# Altium PCB PCB1.PcbDoc
Units mm, origin at the board's own origin, x right, y up, seen from the top; angles counter-clockwise.
Board outline 26.42 x 23.24 mm, 2 copper layers (Top Layer, Bottom Layer); 14 components, 11 nets, 52 pads, 13 vias.
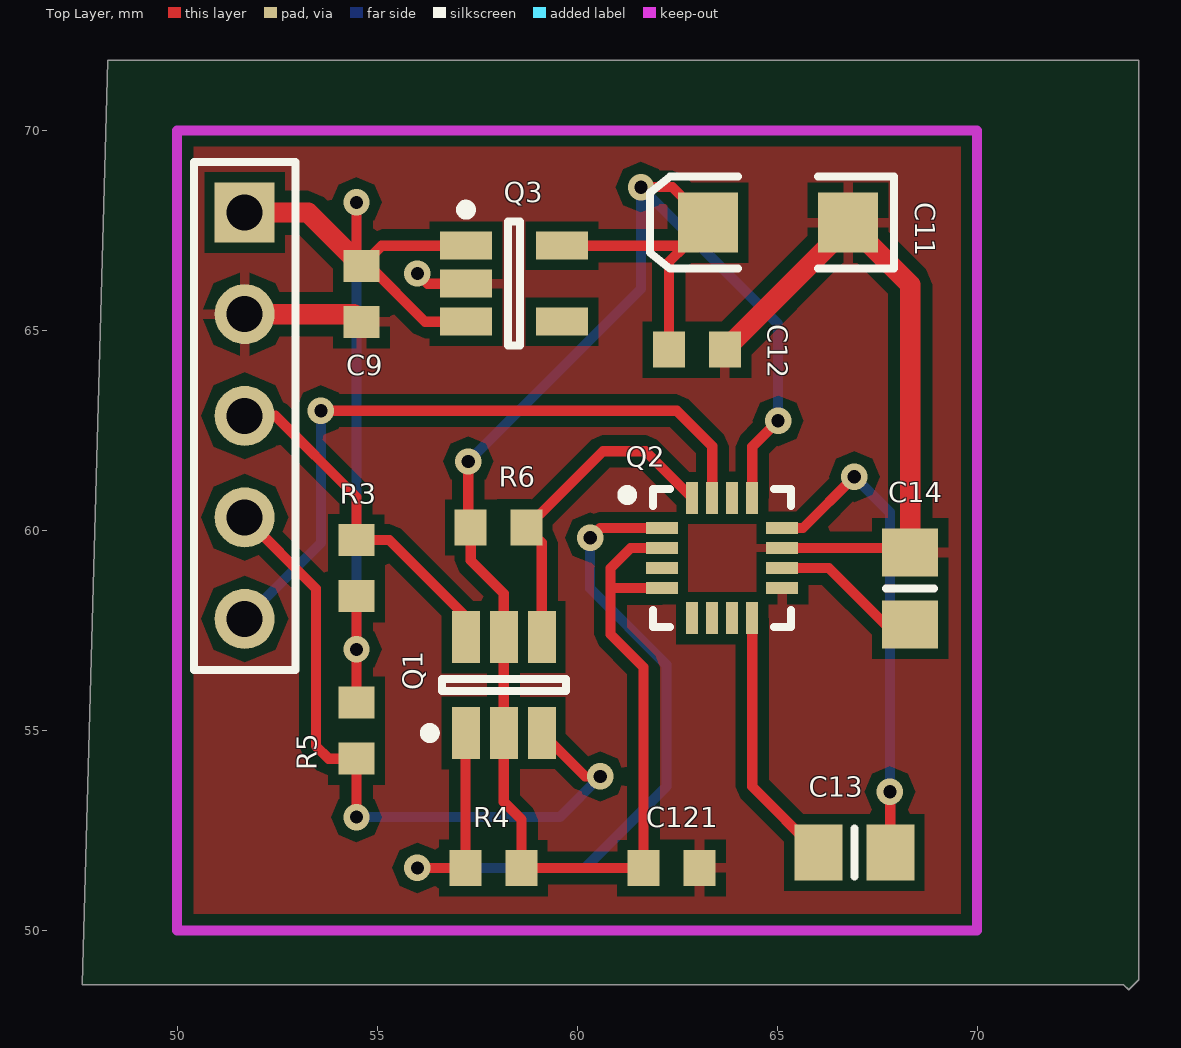
[diagram p0: Top Layer view]
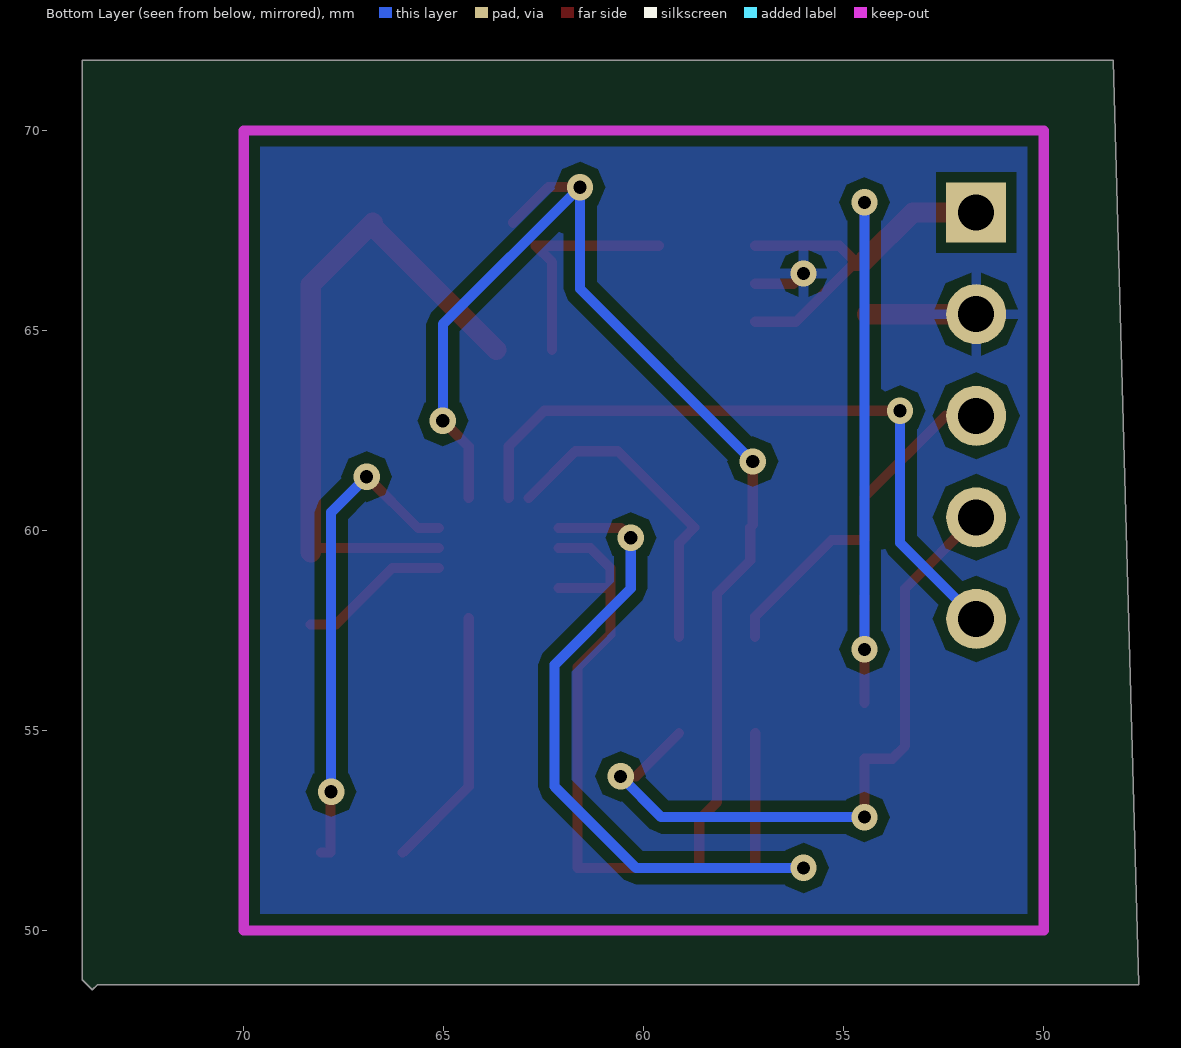
[diagram p1: Bottom Layer view, seen from below]

## Layer stack, top to bottom
Top Layer: signal copper 0.0356
Dielectric: dielectric 0.32, FR-4, Dk 4.8
Bottom Layer: signal copper 0.0356

## Board outline
48.26,71.755 74.041,71.755 74.041,48.768 73.787,48.514 73.66,48.641 47.625,48.641

## Design rules (kind name [scope] priority, off if disabled: settings)
Clearance [All] p1 off: gap=0.254
ComponentClearance [All] p1: gap=0 collisioncheckmode=3 verticalgap=0.254 showdistances=FALSE
PolygonConnect [All] p1: connectstyle=Relief reliefconductorwidth=0.254 reliefentries=4 polygonreliefangle="90 Angle"
RoutingVias [All] p1: holewidth=0.711 width=1.27 viastyle="Through Hole" minholewidth=0.711 minwidth=1.27 maxholewidth=0.711 maxwidth=1.27
SilkscreenOverComponentPads [All] p1: minsilkscreentomaskgap=0.254
SolderMaskExpansion [All] p1: expansion=0.102
Width [All] p1: maxlimit=1.27 minlimit=0.254 preferedwidth=0.254
26 further rules are at their usual default settings.

## Classes and differential pairs
component class Sheet1: C9 C11 C12 C13 C14 C121 Q1 Q2 R3 R4 R5 R6

## Components (designator, comment, footprint, x,y, rotation, side; value= is the part's Value field where it differs from the comment)
C9 "Cap" 1608[0603] 54.61,65.913 r90 top
C11 "Cap" 3.2X1.6X1.1 65.024,67.691 r180 top
C12 "Cap" 1608[0603] 62.992,64.516 r180 top
C13 "Cap" 6-0805_N 66.929,51.943 r180 top
C14 "Cap" 6-0805_N 68.326,58.547 r270 top
C121 "Cap" 1608[0603] 62.357,51.562 r180 top
Q1 "N_MOS" SOT23-6_M 58.166,56.134 r90 top (schematic designator S?)
Q2 "HMC5883L" HMC5883L 63.627,59.309 r0 top (schematic designator *)
Q3 "3.3V  LDO" SOT23-5_M 58.42,66.167 r0 top (schematic designator *)
R3 "Res1" 1608[0603] 54.483,59.055 r270 top
R4 "Res1" 1608[0603] 57.912,51.562 r0 top
R5 "Res1" 1608[0603] 54.483,54.991 r90 top
R6 "Res1" 1608[0603] 58.039,60.071 r180 top
? "JP1" HDR1X5 51.689,67.945 r270 top

## Footprints (in the part's own frame and the unit in brackets; to place one, negate y for a bottom-side part, rotate by r counter-clockwise, add the part's x,y. Pads: shape width x height; smd on the part's side, far side on the other; paste and mask are expansions set on the pad)
3.2X1.6X1.1 [mm] "SMT LED; 2 Flat Leads"
  rect 1.5x1.5 smd: 1(-1.75,0) 2(1.75,0)
  silkscreen extent -2.9,-1.15 3.2,1.15
6-0805_N [mm] "Chip Resistor, Body 2.0x1.2mm, IPC Medium Density"
  rect 1.2x1.4 smd: 1(-0.9,0) 2(0.9,0)
  silkscreen extent 0,-0.6 0,0.6, body extent -1.07,-0.7 1.07,0.7, height 0.7
1608[0603] [mm] "Chip Capacitor, Body 1.6x0.8mm, IPC High Density"
  rect 0.8x0.9 smd: 1(-0.7,0) 2(0.7,0)
  body extent -0.87,-0.48 0.87,0.48, height 1.3
HDR1X5 [mm] "Connector; Header; 5 Position"
  rect 1.5x1.5 hole 0.9: 1(0,0)
  round 1.5 hole 0.9: 2(2.54,0) 3(5.08,0) 4(7.62,0) 5(10.16,0)
  silkscreen extent -1.27,-1.27 11.43,1.27
HMC5883L [mm]
  rect 0.8x0.3 smd: 1(-1.5,0.75) 2(-1.5,0.25) 3(-1.5,-0.25) 4(-1.5,-0.75) 9(1.5,-0.75) 10(1.5,-0.25) 11(1.5,0.25) 12(1.5,0.75)
  rect 0.3x0.8 smd: 5(-0.75,-1.5) 6(-0.25,-1.5) 7(0.25,-1.5) 8(0.75,-1.5) 13(0.75,1.5) 14(0.25,1.5) 15(-0.25,1.5) 16(-0.75,1.5)
  silkscreen extent -2.5,-1.73 1.73,1.73, body extent -1.63,-1.63 1.63,1.63, height 1
SOT23-5_M [mm] "SOT23, 5-Leads, Body 2.9x1.6mm, Pitch 0.95mm, Lead Span 2.8mm, IPC Low Density"
  rect 1.3x0.7 smd: 1(-1.2,0.95) 2(-1.2,0) 3(-1.2,-0.95) 4(1.2,-0.95) 5(1.2,0.95)
  silkscreen extent -1.32,-1.55 0.15,1.97, body extent -0.9,-1.55 0.9,1.55, height 1.45
SOT23-6_M [mm] "SOT23, 6-Leads, Body 2.9x1.6mm, Pitch 0.95mm, Lead Span 2.7mm, IPC Low Density"
  rect 1.3x0.7 smd: 1(-1.2,0.95) 2(-1.2,0) 3(-1.2,-0.95) 4(1.2,-0.95) 5(1.2,0) 6(1.2,0.95)
  silkscreen extent -1.32,-1.55 0.15,1.97, body extent -0.9,-1.55 0.9,1.55, height 1.45

## Part data
C9 C11 C12 C13 C14 C121: "Capacitor"
Q1: library part "SW DIP-3", "DIP Switch, 3 Position, SPST"
R3 R4 R5 R6: "Resistor"
?: library part "Header 5", "Header, 5-Pin"

## Via types
v1: diameter 0.66, hole 0.33, Top Layer to Bottom Layer, 13 vias

## Nets (pads, with @x,y where several pads share a name; then routed paths per layer and width w, separated by ;. In a path a pad name is that pad's centre, name@x,y a point inside that pad or via, vN(x,y) a via of type N, cw(c..) or ccw(c..) an arc to the next point about the centre after c; other vN are vias at no path point)
EX_SCL: ?.3 Q1.6 R3.1 | length 8.7
  Top Layer w0.254: ?.3 52.451,62.865 54.483,60.833 R3.1 55.307,59.755 57.216,57.846 Q1.6
EX_SDA: ?.4 Q1.3 R5.1 | length 17.5
  Top Layer w0.254: ?.4 53.467,58.547 53.467,54.61 53.786,54.291 R5.1 v1(54.483,52.832) ; Q1.3 60.202,53.848 v1(60.579,53.848)
  Bottom Layer w0.254: v1(54.483,52.832) 59.563,52.832 v1(60.579,53.848)
GND: ?.2 C9.1 C11.1 C12.1 C14.1 C121.1 Q2.9 Q2.11 Q3.2 | length 20.6
  Top Layer w0.254: v1(56.007,66.421) 56.261,66.167 Q3.2 ; Q2.11 68.214,59.559 C14.1 ; C11.1@66.774,67.598 C11.1
  Top Layer w0.508: ?.2 C9.1@54.418,65.405 ; C12.1 C11.1@66.774,67.598 ; C11.1 68.326,66.139 C14.1
M-DRDY: ?.5 Q2.15 | length 17.4
  Top Layer w0.254: v1(53.594,62.992) 62.488,62.992 63.377,62.103 Q2.15
  Bottom Layer w0.254: ?.5 53.594,59.69 v1(53.594,62.992)
Net*_8: C13.2 Q2.8 | length 6.6
  Top Layer w0.254: Q2.8 64.377,53.595 C13.2
Net*_10: C14.2 Q2.10 | length 3.8
  Top Layer w0.254: Q2.10 66.29,59.059 67.702,57.647 C14.2
Net*_12: C13.1 Q2.12 | length 12.3
  Top Layer w0.254: Q2.12 65.647,60.059 v1(66.929,61.341) ; v1@67.829,53.456 C13.1 C13.1@68.072,51.943
  Bottom Layer w0.254: v1(66.929,61.341) 67.818,60.452 v1(67.818,53.467)
SCL: Q1.1 Q2.1 R4.1 | length 20.6
  Top Layer w0.254: v1(56.007,51.562) R4.1 Q1.1@57.212,54.93 ; v1(60.325,59.817) 60.567,60.059 Q2.1
  Bottom Layer w0.254: v1(56.007,51.562) 60.198,51.562 62.23,53.594 62.23,56.642 60.325,58.547 v1(60.325,59.817)
SDA: Q1.4 Q2.16 R6.1 | length 8.3
  Top Layer w0.254: Q1.4 59.116,59.694 R6.1 60.644,61.976 61.71,61.976 Q2.16
VCC: ?.1 C9.2 Q3.1 Q3.3 R3.2 R5.2 | length 24.6
  Top Layer w0.254: R5.2 v1(54.483,57.023) R3.2 ; C9.2@54.483,66.74 v1(54.483,68.199) ; Q3.3 56.195,65.217 54.799,66.613 C9.2 55.114,67.117 Q3.1
  Top Layer w0.508: ?.1 53.278,67.945 C9.2@54.483,66.74
  Bottom Layer w0.254: v1(54.483,57.023) v1(54.483,68.199)
VCC_3.3V: C11.2 C12.2 C121.2 Q1.2 Q1.5 Q2.2 Q2.4 Q2.13 Q3.5 R4.2 R6.2 | length 50.3
  Top Layer w0.254: R6.2@57.277,60.133 v1(57.277,61.722) ; R6.2 57.339,59.247 58.166,58.42 Q1.5 Q1.2 58.166,53.213 58.612,52.767 R4.2 C121.2 61.657,56.58 60.833,57.404 60.833,59.055 61.337,59.559 Q2.2 ; Q3.5 62.7,67.117 62.292,66.709 C12.2 ; 60.845,58.559 Q2.4 ; v1(61.595,68.58) 62.385,68.58 C11.2 ; Q2.13 64.377,62.091 v1(65.024,62.738)
  Bottom Layer w0.254: v1(57.277,61.722) 61.595,66.04 v1(61.595,68.58) 65.024,65.151 v1(65.024,62.738)
pads on no net: Q2.3 Q2.5 Q2.6 Q2.7 Q2.14 Q3.4

## Polygon pours and split planes (outlines as drawn)
GND on Bottom Layer "Top Layer-No Net" (solid, pour order 8): 50,70 70,70 69.85,69.85 69.85,50.165 50.165,50.165
GND on Top Layer "Top Layer-No Net" (solid, pour order 10): 50.038,69.723 69.723,69.723 69.723,50.277 70,50 69.708,50.292 50,50.292

## Keep-outs
Keep-Out Layer:
  lines w0.254: 50,50 50,70 70,70 70,50 50,50